# Altium PCB PCB1.PcbDoc
Units mil, origin at the board's own origin, x right, y up, seen from the top; angles counter-clockwise.
Board outline 3335 x 2255 mil, 2 copper layers (Top Layer, Bottom Layer); 22 components, 16 nets, 66 pads, 0 vias.
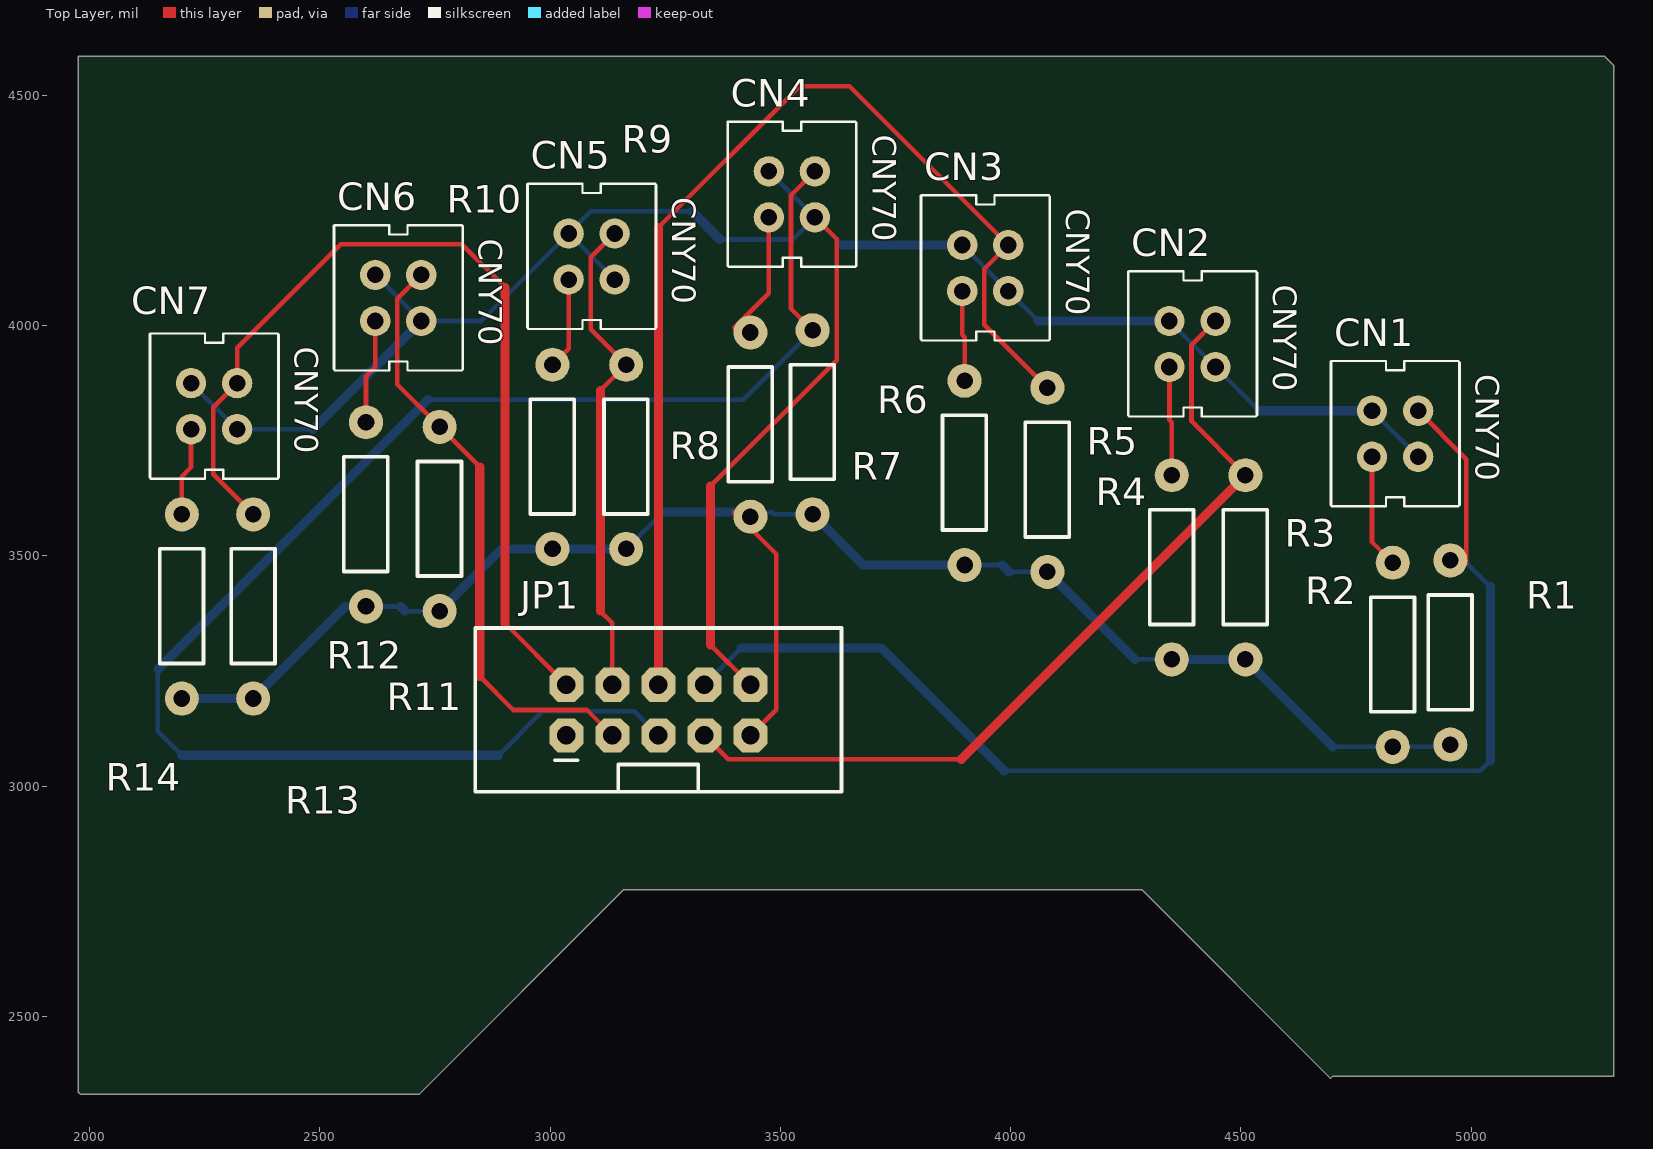
[diagram p0: Top Layer view]
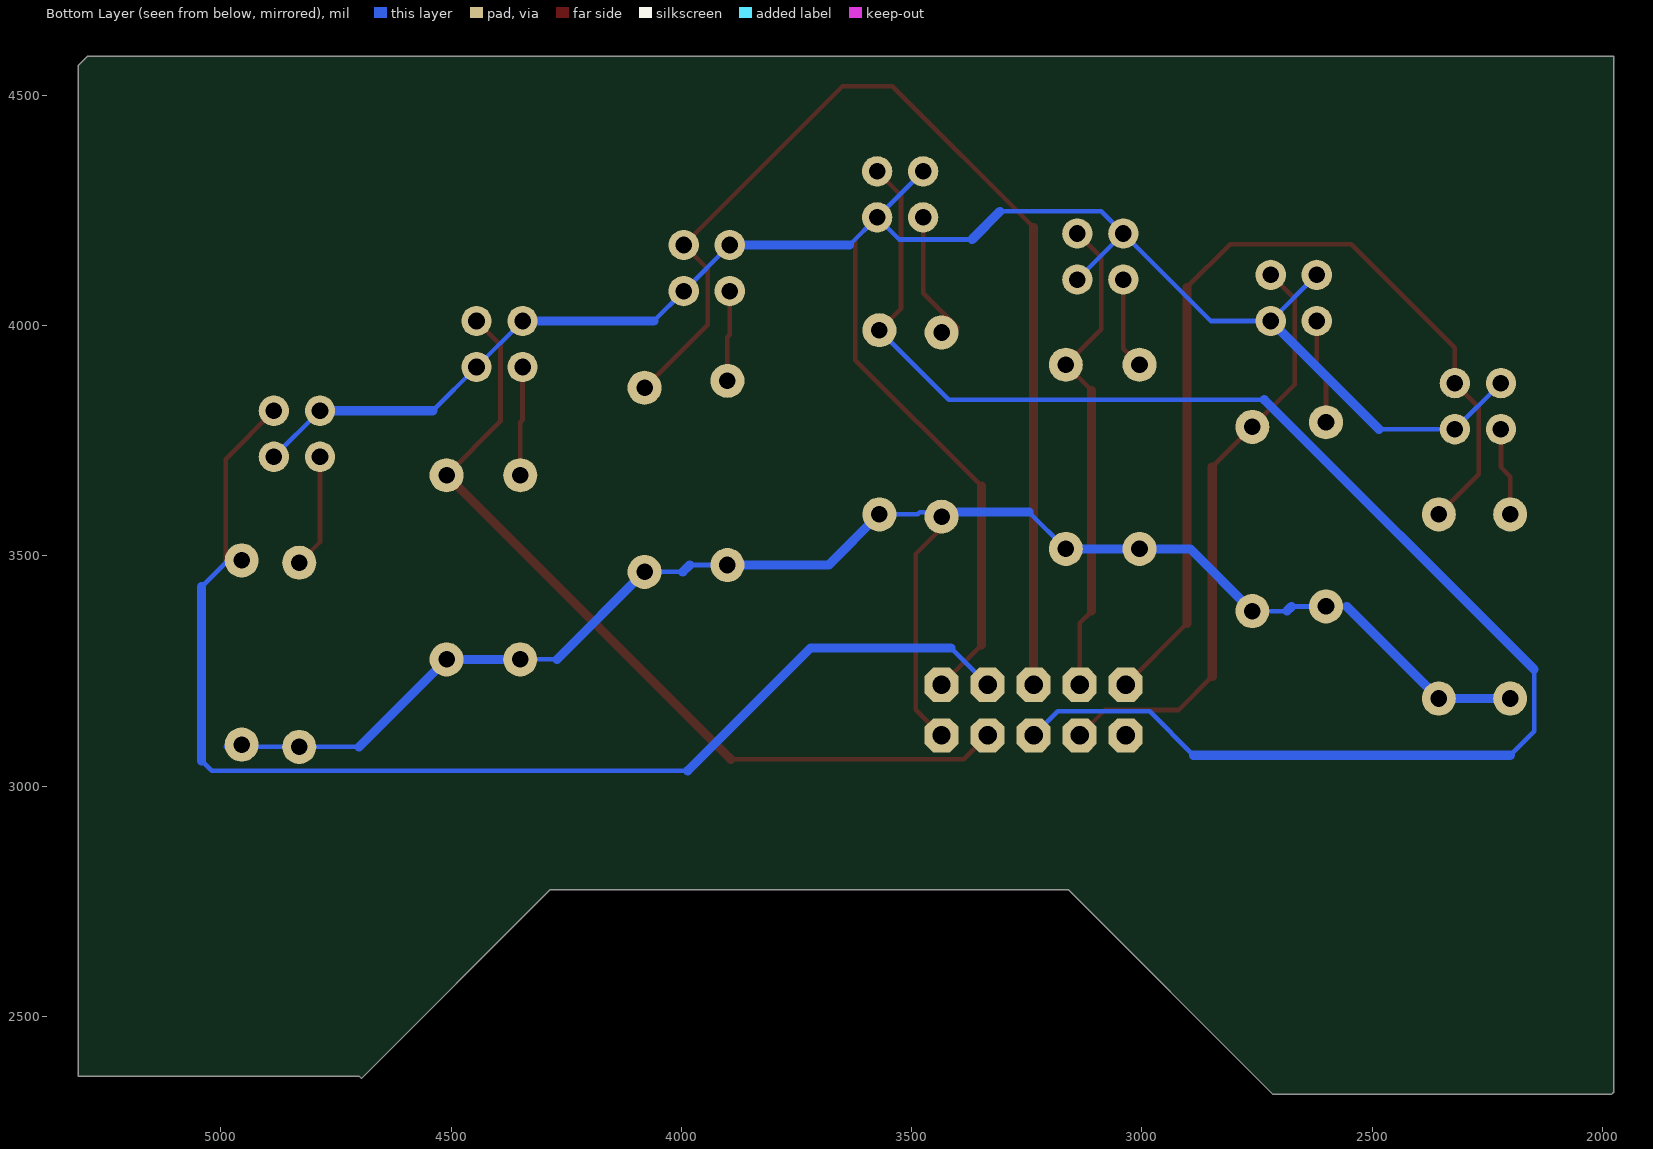
[diagram p1: Bottom Layer view, seen from below]

## Layer stack, top to bottom
Top Solder: solder mask 0.4, Solder Resist, Dk 3.5
Top Layer: signal copper 1.4
Dielectric 1: dielectric 12.6, FR-4, Dk 4.8
Bottom Layer: signal copper 1.4
Bottom Solder: solder mask 0.4, Solder Resist, Dk 3.5

## Board outline
1980,2330 1975,2335 1975,4585 5290,4585 5310,4565 5310,2370 4700,2370 4695,2365 4285,2775 3160,2775 2715,2330

## Design rules (kind name [scope] priority, off if disabled: settings)
Clearance [All] p1: gap=10 except(0: Track-Region SMDPad-SMDPad SMDPad-THPad SMDPad-Via SMDPad-Region THPad-Region Via-Region; 8: Track-Track Track-SMDPad Track-THPad Track-Via Track-Fill Track-Poly SMDPad-Fill SMDPad-Poly THPad-THPad THPad-Via THPad-Fill THPad-Poly Via-Via Via-Fill Via-Poly)
PolygonConnect [All] p1: connectstyle=Relief reliefconductorwidth=10 reliefentries=4 polygonreliefangle="90 Angle" airgapwidth=10
RoutingVias [All] p1: holewidth=28 width=50 viastyle="Through Hole" minholewidth=28 minwidth=50 maxholewidth=28 maxwidth=50
SolderMaskExpansion [All] p1: expansion=4
Width [All] p1: maxlimit=99999 minlimit=8 preferedwidth=20 minimp=50.000000 maximp=50.000000 favimp=50.000000
30 further rules are at their usual default settings.

## Components (designator, comment, footprint, x,y, rotation, side; value= is the part's Value field where it differs from the comment)
CN1 "CNY70" 4 4835,3765 r0 top
CN2 "CNY70" 4 4395,3960 r0 top
CN3 "CNY70" 4 3945,4125 r0 top
CN4 "CNY70" 4 3525,4285 r0 top
CN5 "CNY70" 4 3090,4150 r0 top
CN6 "CNY70" 4 2670,4060 r0 top
CN7 "CNY70" 4 2270,3825 r0 top
JP1 "Header 5x2Standard 10-pin dual row 0.1\" header. Commonly used with AVR-ISP. Use with Spark Fun Electronics SKU: PRT-00778" 2X5-SHROUDED_LOCK 3235,3165 r90 top
R1 "100k" AXIAL-0.4 4955,3290 r90 top
R2 "470" AXIAL-0.4 4830,3285 r90 top
R3 "100k" AXIAL-0.4 4510,3475 r90 top
R4 "470" AXIAL-0.4 4350,3475 r90 top
R5 "100k" AXIAL-0.4 4080,3665 r90 top
R6 "470" AXIAL-0.4 3900,3680 r90 top
R7 "100k" AXIAL-0.4 3570,3790 r90 top
R8 "470" AXIAL-0.4 3435,3785 r90 top
R9 "100k" AXIAL-0.4 3165,3715 r90 top
R10 "470" AXIAL-0.4 3005,3715 r90 top
R11 "100k" AXIAL-0.4 2760,3580 r90 top
R12 "470" AXIAL-0.4 2600,3590 r90 top
R13 "100k" AXIAL-0.4 2355,3390 r90 top
R14 "470" AXIAL-0.4 2200,3390 r90 top

## Footprints (in the part's own frame and the unit in brackets; to place one, negate y for a bottom-side part, rotate by r counter-clockwise, add the part's x,y. Pads: shape width x height; smd on the part's side, far side on the other; paste and mask are expansions set on the pad)
2X5-SHROUDED_LOCK [mil]
  oct 74x74 hole 40: 1(-55,200) 2(55,200) 3(-55,100) 4(55,100) 5(-55,0) 6(55,0) 7(-55,-100) 8(55,-100) 9(-55,-200) 10(55,-200)
  silkscreen extent -177,-398 178,398
4 [mil]
  round 66 hole 36: A(-50,50) C(50,-50) E(50,50) K(-50,-50)
  silkscreen extent -139,-157 140,158
AXIAL-0.4 [mil]
  round 74 hole 36: P$1(-200,0) P$2(200,0)
  silkscreen extent -124,-47 125,48

## Part data
JP1: library part M05X2SHD_LOCK
R1 R2 R3 R4 R5 R6 R7 R8 R9 R10 R11 R12 R13 R14: library part RESISTORPTH-1/4W

## Nets (pads, with @x,y where several pads share a name; then routed paths per layer and width w, separated by ;. In a path a pad name is that pad's centre, name@x,y a point inside that pad or via, vN(x,y) a via of type N, cw(c..) or ccw(c..) an arc to the next point about the centre after c; other vN are vias at no path point)
GND: JP1.9 R1.P$1 R2.P$1 R3.P$1 R4.P$1 R5.P$1 R6.P$1 R7.P$1 R8.P$1 R9.P$1 R10.P$1 R11.P$1 R12.P$1 R13.P$1 R14.P$1 | length 3723.2
  Top Layer w10: R8.P$1@3400,3595 3491,3504 3491,3166 JP1.9
  Bottom Layer w10: 2555,3390 R12.P$1 2675,3390 ; 2685,3380 R11.P$1 ; R9.P$1 3245,3595 ; R8.P$1@3400,3595 3482,3595 3487,3590 R7.P$1 ; R6.P$1 3982,3480 ; 3997,3465 R5.P$1 ; 4270,3275 R4.P$1 ; 4700,3085 R2.P$1 R1.P$1@4990,3085
  Bottom Layer w20: R14.P$1 R13.P$1 2555,3390 ; 2675,3390 2685,3380 ; R11.P$1 2895,3515 R10.P$1 R9.P$1 ; 3245,3595 R8.P$1@3400,3595 ; R7.P$1 3680,3480 R6.P$1 ; 3982,3480 3997,3465 ; R5.P$1 4270,3275 ; R4.P$1 R3.P$1 4700,3085
NetCN1_E: CN1.E JP1.8 R1.P$2 | length 2684.9
  Top Layer w10: CN1.E 4990,3710 R1.P$2@4990,3485
  Bottom Layer w10: JP1.8 3415,3300 ; 3986,3033 5020,3033 5042,3055 ; R1.P$2@4990,3485 5042,3433
  Bottom Layer w20: 3415,3300 3719,3300 3986,3033 ; 5042,3055 5042,3433
NetCN1_K: CN1.K R2.P$2 | length 248.6
  Top Layer w10: CN1.K 4785,3530 R2.P$2
NetCN2_E: CN2.E JP1.7 R3.P$2 | length 1857.1
  Top Layer w10: JP1.7 3387,3058 3893,3058 ; CN2.E 4393,3958 4393,3792 R3.P$2
  Top Layer w20: 3893,3058 R3.P$2
NetCN2_K: CN2.K R4.P$2 | length 237.1
  Top Layer w10: CN2.K 4345,3795 4350,3790 R4.P$2
NetCN3_E: CN3.E JP1.6 R5.P$2 | length 2411.4
  Top Layer w10: 3235,4213 3542,4520 3650,4520 CN3.E 3943,4123 3943,4002 R5.P$2
  Top Layer w20: JP1.6 3235,4213
NetCN3_K: CN3.K R6.P$2 | length 197.1
  Top Layer w10: CN3.K 3895,3980 3900,3975 R6.P$2
NetCN4_E: CN4.E JP1.5 R7.P$2 | length 3416.7
  Top Layer w10: R7.P$2 3523,4037 3523,4283 CN4.E
  Bottom Layer w10: 2148,3253 2148,3119 2200,3067 ; 2734,3839 3419,3839 R7.P$2 ; 2888,3067 2983,3162 3183,3162 JP1.5
  Bottom Layer w20: 2148,3253 2734,3839 ; 2200,3067 2888,3067
NetCN4_K: CN4.K R8.P$2 | length 271.1
  Top Layer w10: R8.P$2@3400,3995 3475,4070 CN4.K
NetCN5_E: CN5.E JP1.4 R9.P$2 | length 1067.4
  Top Layer w10: 3109,3380 3135,3354 JP1.4 ; 3109,3859 R9.P$2 3088,3992 3088,4148 CN5.E
  Top Layer w20: 3109,3380 3109,3859
NetCN5_K: CN5.K R10.P$2 | length 199.5
  Top Layer w10: R10.P$2 3040,3950 CN5.K
NetCN6_E: CN6.E JP1.3 R11.P$2 | length 1308.7
  Top Layer w10: CN6.E 2668,4058 2668,3872 R11.P$2 2847,3693 ; 2847,3238 2920,3165 3080,3165 JP1.3
  Top Layer w20: 2847,3238 2847,3693
NetCN6_K: CN6.K R12.P$2 | length 228.3
  Top Layer w10: R12.P$2 2600,3890 2620,3910 CN6.K
NetCN7_E: CN7.E JP1.2 R13.P$2 | length 2051.8
  Top Layer w10: R13.P$2 2268,3677 2268,3823 CN7.E 2320,3952 2545,4177 2808,4177 2902,4083 ; 2902,3353 JP1.2
  Top Layer w20: 2902,3353 2902,4083
NetCN7_K: CN7.K R14.P$2 | length 193.3
  Top Layer w10: R14.P$2 2200,3672 2220,3692 CN7.K
VCC: CN1.A CN1.C CN2.A CN2.C CN3.A CN3.C CN4.A CN4.C CN5.A CN5.C CN6.A CN6.C CN7.A CN7.C JP1.10 | length 4771.1
  Top Layer w10: 3348,3307 JP1.10 ; 3348,3651 3622,3925 3622,4188 CN4.C
  Top Layer w20: 3348,3307 3348,3651
  Bottom Layer w10: CN7.A CN7.C 2485,3775 ; CN6.A CN6.C 2850,4010 CN5.A ; CN5.C CN5.A ; 3308,4248 3088,4248 CN5.A ; 3369,4187 3527,4187 CN4.C ; CN4.A CN4.C ; 3635,4175 CN4.C ; CN3.A CN3.C 4060,4010 ; CN2.A CN2.C 4540,3815 ; CN1.A CN1.C
  Bottom Layer w20: 2485,3775 CN6.C ; 3308,4248 3369,4187 ; 3635,4175 CN3.A ; 4060,4010 CN2.A ; 4540,3815 CN1.A
pads on no net: JP1.1

## Silkscreen, mask and mechanical layers (free items; w line width, h text height)
Mechanical 1:
  lines w10: 1975,2335 1975,2555 1975,2730 1975,4585 5290,4585 5310,4565 5310,2370 4700,2370 4695,2365 4285,2775 3200,2775 3160,2775 2715,2330 1980,2330 1975,2335